# Altium PCB PCB_MAX7219_SHIELD.PcbDoc
Units mil, origin at the board's own origin, x right, y up, seen from the top; angles counter-clockwise.
Board outline 2755.91 x 2244.09 mil, 2 copper layers (Top Layer, Bottom Layer); 8 components, 25 nets, 164 pads, 11 vias.
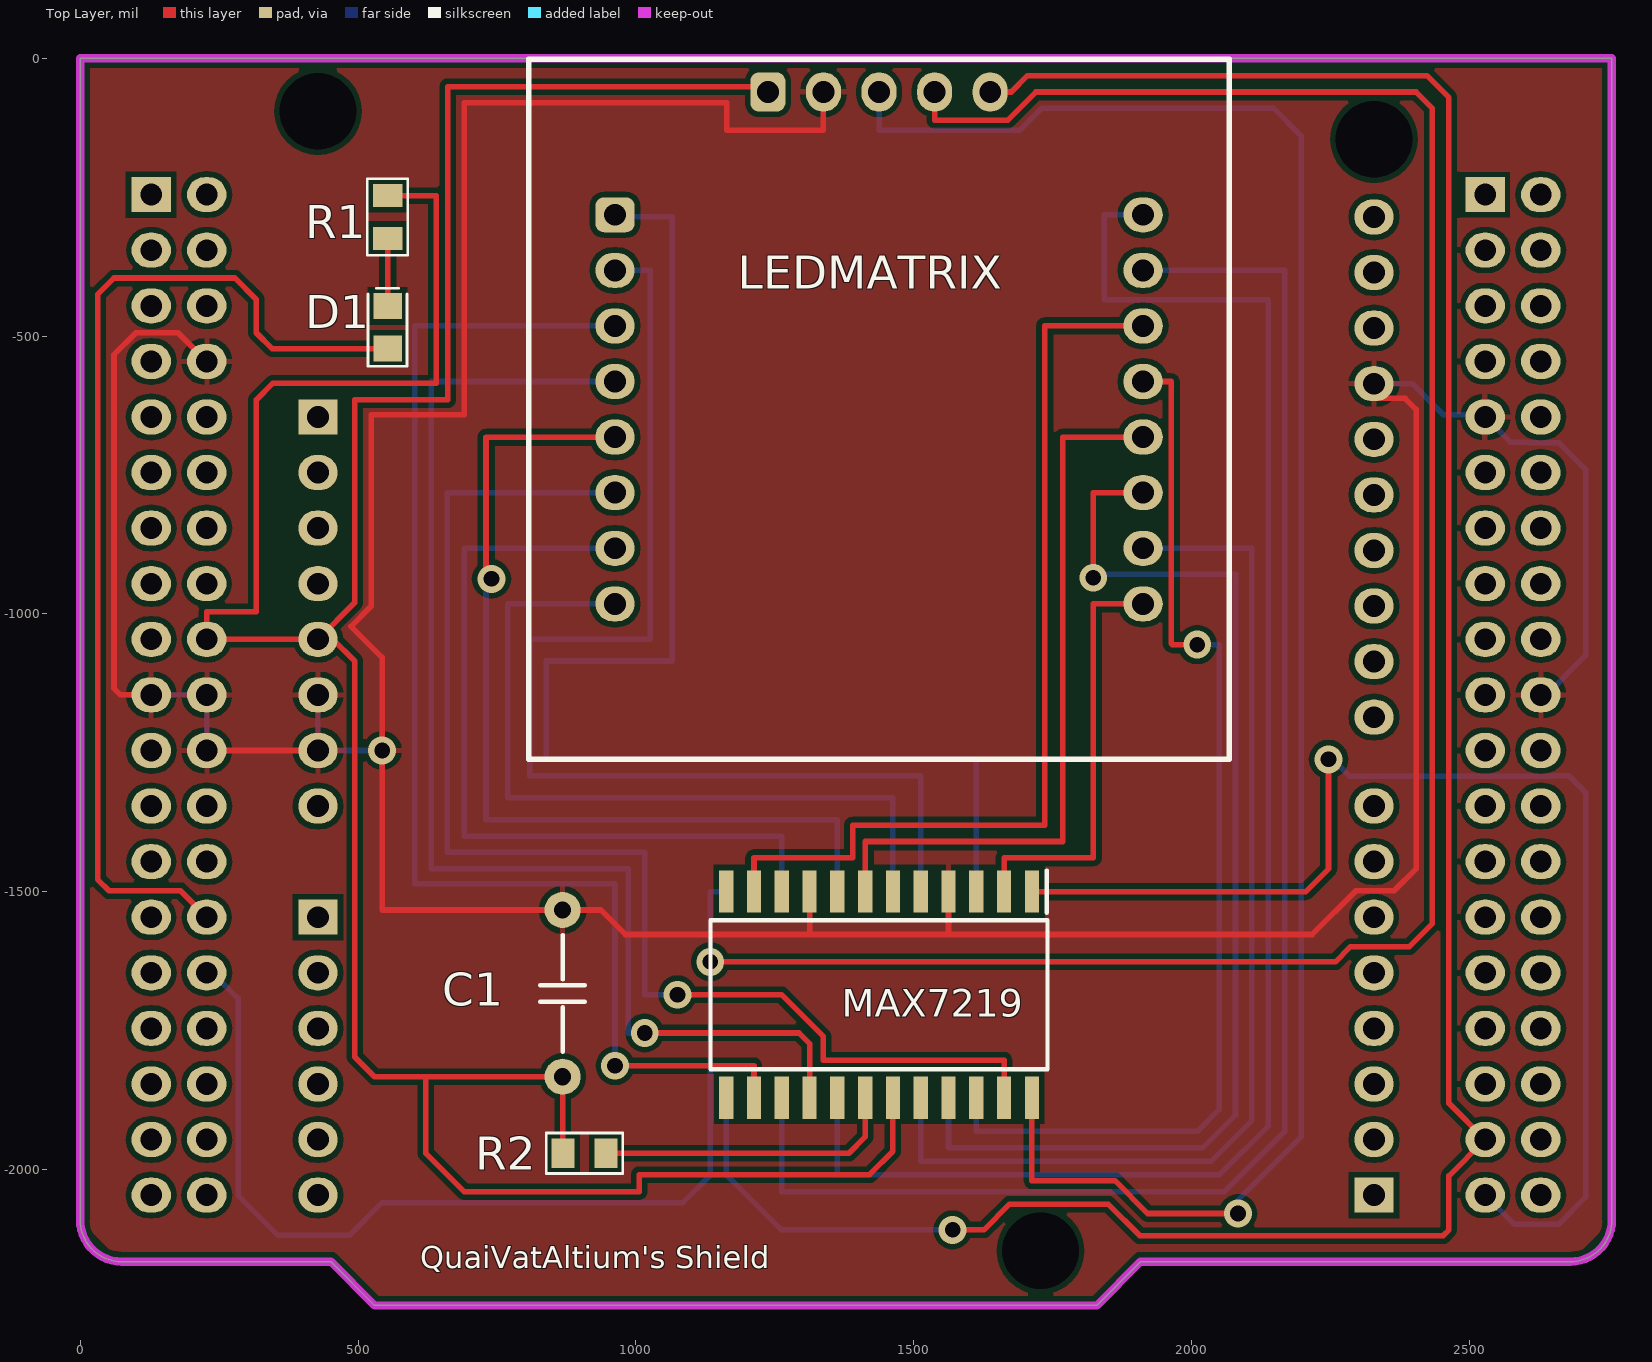
[diagram p0: Top Layer view]
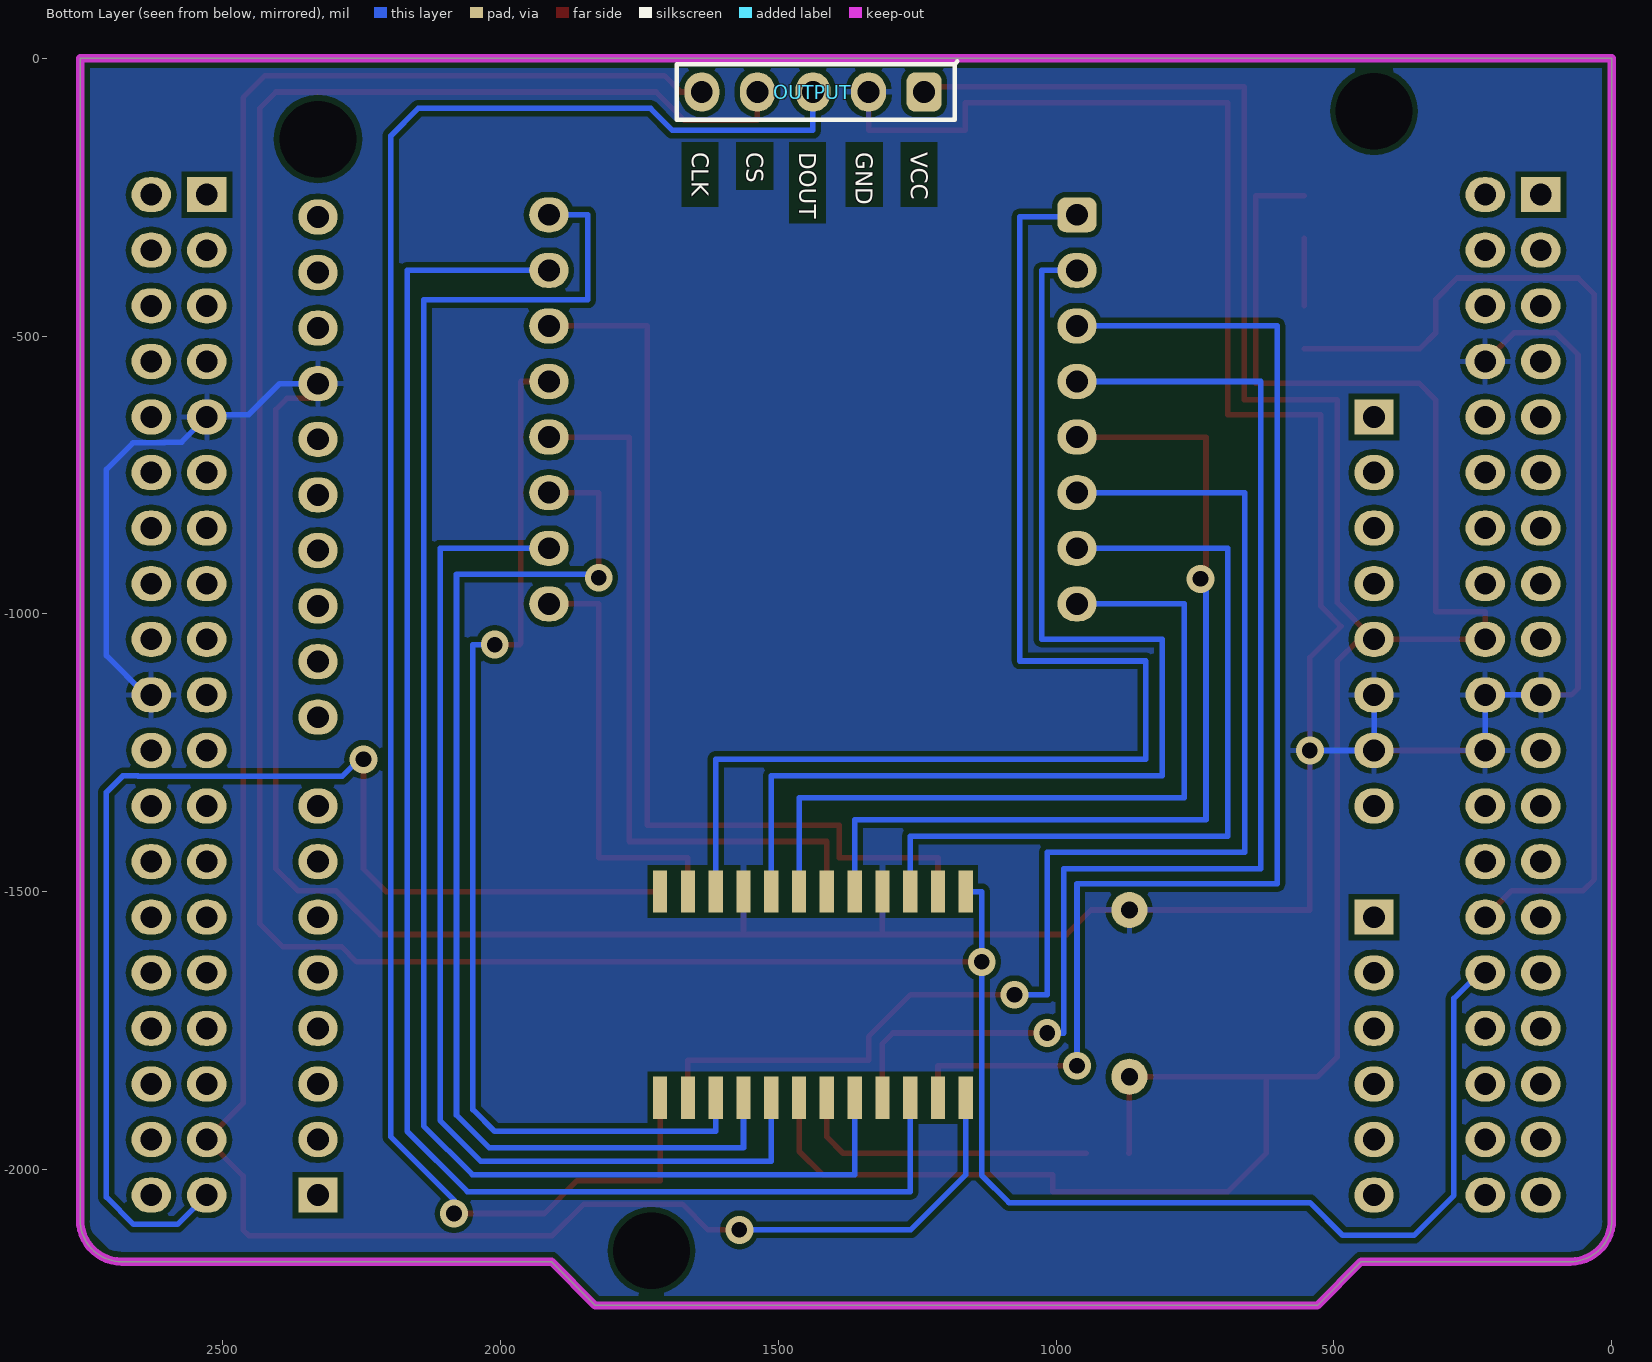
[diagram p1: Bottom Layer view, seen from below]
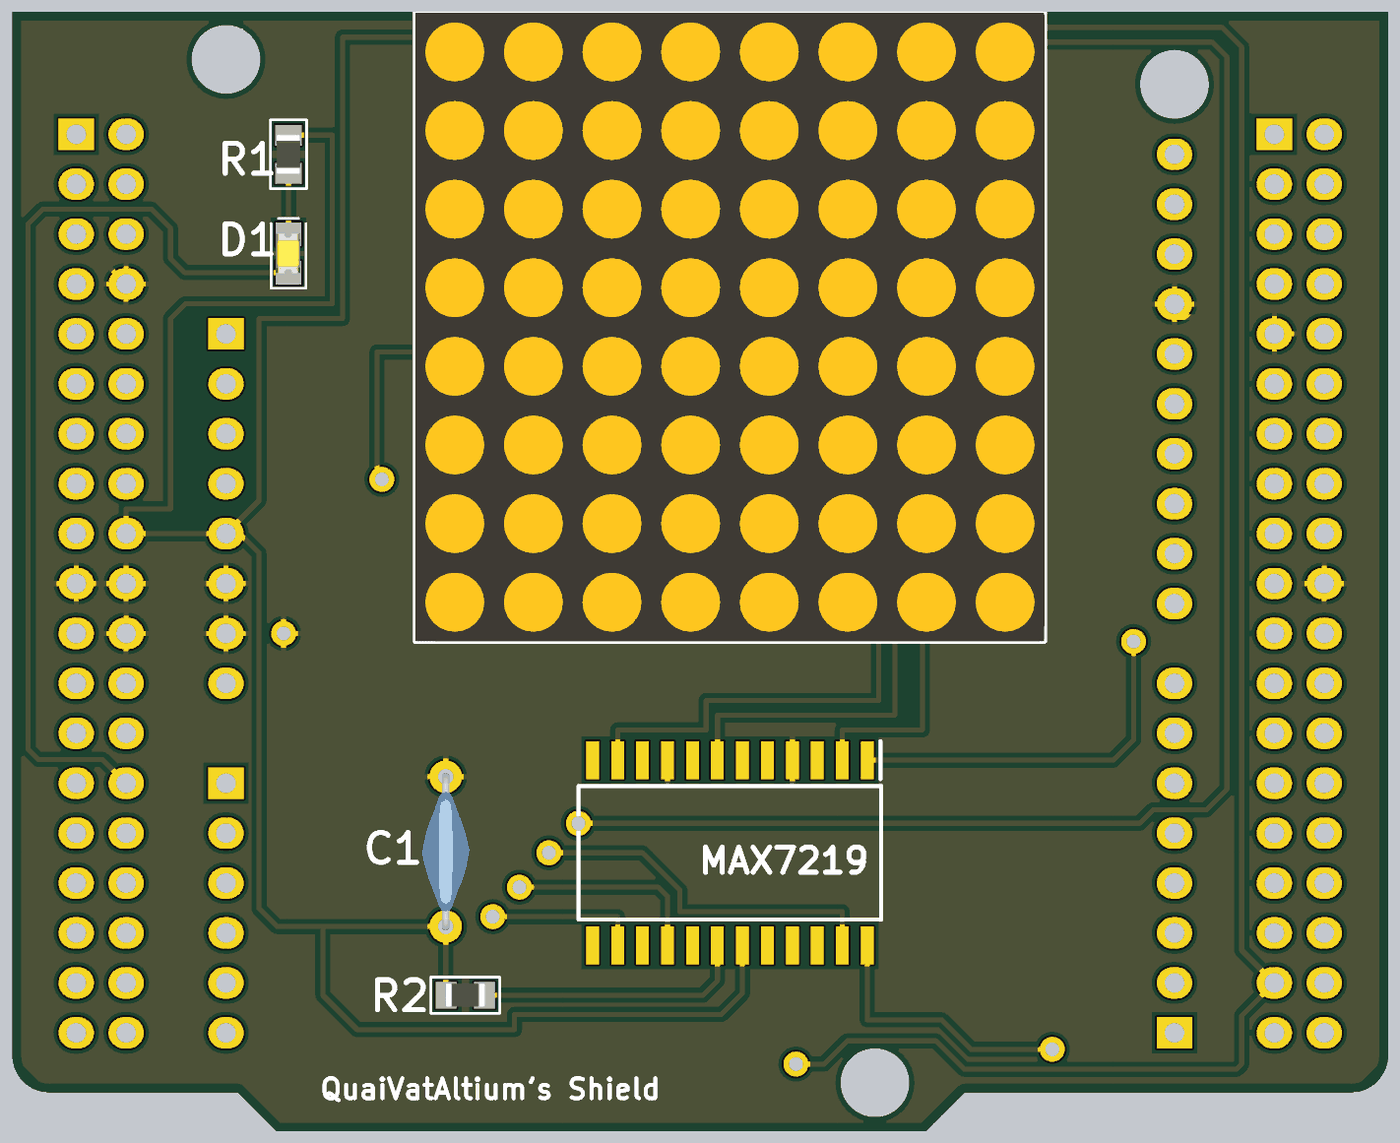
[diagram p2: 3D render of the assembled board from above, using the file's embedded part models]

## Layer stack, top to bottom
Top Solder: solder mask 0.4, Solder Resist, Dk 3.5
Top Layer: signal copper 1.4
Dielectric 1: dielectric 12.6, FR-4, Dk 4.8
Bottom Layer: signal copper 1.4
Bottom Solder: solder mask 0.4, Solder Resist, Dk 3.5

## Board outline
0,-2090.35 ccw(c75,-2090.35) 75,-2165.35 451.18,-2165.35 529.92,-2244.09 1829.13,-2244.09 1907.87,-2165.35 2680.91,-2165.35 ccw(c2680.91,-2090.35) 2755.91,-2090.35 2755.91,0 0,0

## Design rules (kind name [scope] priority, off if disabled: settings)
Clearance [All] p1: gap=10 ignorepadtopadclearanceinfootprint=FALSE except(0: Arc-Hole Track-Hole SMDPad-Hole THPad-Hole Via-Hole Fill-Hole Poly-Hole Region-Hole Text-Hole)
ComponentClearance [InComponent('U1')] p1: gap=0 collisioncheckmode=3 verticalgap=0 showdistances=FALSE
PolygonConnect [All] p1: connectstyle=Relief reliefconductorwidth=10 reliefentries=4 polygonreliefangle="90 Angle" airgapwidth=10
RoutingVias [All] p1: holewidth=28 width=50 viastyle="Through Hole" minholewidth=28 minwidth=50 maxholewidth=28 maxwidth=50
SolderMaskExpansion [All] p1: expansion=4
Width [All] p1: maxlimit=10 minlimit=10 preferedwidth=10
29 further rules are at their usual default settings.

## Classes and differential pairs
component class SCH_MAX7219_SHIELD: C1 LEDMATRIX OUTPUT "QuaiVatAltium's Shield" R1 R2 TESTLED

## Components (designator, comment, footprint, x,y, rotation, side; value= is the part's Value field where it differs from the comment)
C1 "100nf" "CAP Ceramic/W300" 868.11,-1532.68 r270 top
D1 "Led" "Led 0805" 553.15,-484.25 r270 top
LEDMATRIX "1088AS" LED/MATRIX/1088 1437.4,-631.89 r270 top locked (schematic designator D2)
MAX7219 "MAX7219CWG+" SOIC127P1032X265-24N 1437.4,-1685.04 r270 top locked (schematic designator B1)
OUTPUT "Header 5" HDR/Header/5 1437.4,-61.02 r0 bottom locked (schematic designator P1)
"QuaiVatAltium's Shield" "NUCLEO-F103RB" NUCLEO 0,-2165.35 r0 top locked (schematic designator U1)
R1 "9.53k" "R 0805" 553.15,-285.83 r270 top
R2 "9.53k" "R 0805" 907.48,-1970.47 r180 top

## Footprints (in the part's own frame and the unit in brackets; to place one, negate y for a bottom-side part, rotate by r counter-clockwise, add the part's x,y. Pads: shape width x height; smd on the part's side, far side on the other; paste and mask are expansions set on the pad)
"CAP Ceramic/W300" [mil]
  round 65 hole 31: 1(0,0) 2(300,0)
  silkscreen extent 45,-40 255,40, body extent -8,-47 307,47, height 340
HDR/Header/5 [mm]
  rrect50% 1.6x1.8 hole 1: 1(-5.08,0)
  oval 1.6x1.8 hole 1: 2(-2.54,0) 3(0,0) 4(2.54,0) 5(5.08,0)
  silkscreen extent -6.6,-1.4 6.22,1.27, body extent -6.35,-1.27 6.35,1.27, height 8.89
"Led 0805" [mm] "Led SMD 0805"
  rect 1.2x1.3 smd: 1(-0.975,0) 2(0.975,0)
  silkscreen extent -1.78,-0.89 1.78,0.89, body extent -1.01,-0.64 1.01,0.61, height 1.1
LED/MATRIX/1088 [mm]
  rrect50% 1.6x1.8 hole 1: 1(-8.89,-12.065)
  oval 1.6x1.8 hole 1: 2(-6.35,-12.065) 3(-3.81,-12.065) 4(-1.27,-12.065) 5(1.27,-12.065) 6(3.81,-12.065) 7(6.35,-12.065) 8(8.89,-12.065) 9(8.89,12.065) 10(6.35,12.065) 11(3.81,12.065) 12(1.27,12.065) 13(-1.27,12.065) 14(-3.81,12.065) 15(-6.35,12.065) 16(-8.89,12.065)
  silkscreen extent -16,-16 16,16, body extent -16,-16 16,16, height 8
NUCLEO [mm]
  oval 1.8x1.6 hole 1: A5_1(59.13,24.88) A5_2(59.13,27.42) A5_3(59.13,29.96) A5_4(59.13,32.5) A5_5(59.13,35.04) A5_6(59.13,37.58) A5_7(59.13,40.12) A5_8(59.13,42.66) A5_9(59.13,45.2) A5_10(59.13,47.74) A6_2(10.87,36.06) A6_3(10.87,33.52) A6_4(10.87,30.98) A6_5(10.87,28.44) A6_6(10.87,25.9) A6_7(10.87,23.36) A6_8(10.87,20.82) A8_2(10.87,13.2) A8_3(10.87,10.66) A8_4(10.87,8.12) A8_5(10.87,5.58) A8_6(10.87,3.04) A9_2(59.13,5.58) A9_3(59.13,8.12) A9_4(59.13,10.66) A9_5(59.13,13.2) A9_6(59.13,15.74) A9_7(59.13,18.28) A9_8(59.13,20.82) M7_2(5.79,48.76) M7_3(3.25,46.22) M7_4(5.79,46.22) M7_5(3.25,43.68) M7_6(5.79,43.68) M7_7(3.25,41.14) M7_8(5.79,41.14) M7_9(3.25,38.6) M7_10(5.79,38.6) M7_11(3.25,36.06) M7_12(5.79,36.06) M7_13(3.25,33.52) M7_14(5.79,33.52) M7_15(3.25,30.98) M7_16(5.79,30.98) M7_17(3.25,28.44) M7_18(5.79,28.44) M7_19(3.25,25.9) M7_20(5.79,25.9) M7_21(3.25,23.36) M7_22(5.79,23.36) M7_23(3.25,20.82) M7_24(5.79,20.82) M7_25(3.25,18.28) M7_26(5.79,18.28) M7_27(3.25,15.74) M7_28(5.79,15.74) M7_29(3.25,13.2) M7_30(5.79,13.2) M7_31(3.25,10.66) M7_32(5.79,10.66) M7_33(3.25,8.12) M7_34(5.79,8.12) M7_35(3.25,5.58) M7_36(5.79,5.58) M7_37(3.25,3.04) M7_38(5.79,3.04) M10_2(66.75,48.76) M10_3(64.21,46.22) M10_4(66.75,46.22) M10_5(64.21,43.68) M10_6(66.75,43.68) M10_7(64.21,41.14) M10_8(66.75,41.14) M10_9(64.21,38.6) M10_10(66.75,38.6) M10_11(64.21,36.06) M10_12(66.75,36.06) M10_13(64.21,33.52) M10_14(66.75,33.52) M10_15(64.21,30.98) M10_16(66.75,30.98) M10_17(64.21,28.44) M10_18(66.75,28.44) M10_19(64.21,25.9) M10_20(66.75,25.9) M10_21(64.21,23.36) M10_22(66.75,23.36) M10_23(64.21,20.82) M10_24(66.75,20.82) M10_25(64.21,18.28) M10_26(66.75,18.28) M10_27(64.21,15.74) M10_28(66.75,15.74) M10_29(64.21,13.2) M10_30(66.75,13.2) M10_31(64.21,10.66) M10_32(66.75,10.66) M10_33(64.21,8.12) M10_34(66.75,8.12) M10_35(64.21,5.58) M10_36(66.75,5.58) M10_37(64.21,3.04) M10_38(66.75,3.04)
  rect 1.8x1.6 hole 1: A6_1(10.87,38.6) A8_1(10.87,15.74) A9_1(59.13,3.04) M7_1(3.25,48.76) M10_1(64.21,48.76)
  round 0 hole 3.5 unplated: HOLD(10.87,52.57) HOLD(43.89,0.5) HOLD(59.13,51.3)
  Keep-Out Layer lines w0.381: 0,1.905 ccw(c1.905,1.905) 1.905,0 11.46,0 13.46,-2 46.46,-2 48.46,0 68.095,0 ccw(c68.095,1.905) 70,1.905 70,55 0,55 0,1.905
"R 0805" [mm] "Chip Resistor, 2-Leads, Body 2.0x1.3mm, IPC Medium Density"
  rect 1.05x1.35 smd: 1(-0.975,0) 2(0.975,0)
  silkscreen extent -1.75,-0.92 1.75,0.92, body extent -1,-0.61 1,0.59, height 0.5
SOIC127P1032X265-24N [mm]
  rect 1.925x0.65 all layers, no hole: 1(-4.712,6.985) 2(-4.712,5.715) 3(-4.712,4.445) 4(-4.712,3.175) 5(-4.712,1.905) 6(-4.712,0.635) 7(-4.712,-0.635) 8(-4.712,-1.905) 9(-4.712,-3.175) 10(-4.712,-4.445) 11(-4.712,-5.715) 12(-4.712,-6.985) 13(4.712,-6.985) 14(4.712,-5.715) 15(4.712,-4.445) 16(4.712,-3.175) 17(4.712,-1.905) 18(4.712,-0.635) 19(4.712,0.635) 20(4.712,1.905) 21(4.712,3.175) 22(4.712,4.445) 23(4.712,5.715) 24(4.712,6.985)
  silkscreen extent -5.68,-7.7 3.4,7.7

## Part data
C1: library part "Capacitor NP", "Capacitor non-pol"
D1: "Typical LED"
LEDMATRIX: library part "LED MATRIX 1088AS", "1088AS, Common-Cathode, LED Matrix 8x8, RED, 32x32mm"
MAX7219: "MAX7219CWG+, LED Driver, 8-Digits 64-Segments, 5V, 24-Pin SOIC W", Manufacturer_Name="Maxim Integrated", Mouser Part Number=700-MAX7219CWG, Arrow Part Number=MAX7219CWG+, Arrow Price/Stock=https://www.arrow.com/en/products/max7219cwg/maxim-integrated?region=nac, Datasheet Link=http://datasheets.maximintegrated.com/en/ds/MAX7219-MAX7221.pdf, Geometry.Height=2.65mm, Manufacturer_Part_Number=MAX7219CWG+, Mouser Price/Stock=https://www.mouser.co.uk/ProductDetail/Maxim-Integrated/MAX7219CWG%2b?qs=1THa7WoU59FAb2MozDF%2Fgw%3D%3D
OUTPUT: "Header, 5-Pin"
"QuaiVatAltium's Shield": "STM32F103RB, mbed-Enabled Development Nucleo-64 STM32F1 ARM® Cortex®-M3 MCU 32-Bit Embedded Evaluation Board", Manufacturer=STMicroelectronics, BRAND=STMicroelectronics, Manufacturer Product Number=NUCLEO-F103RB, PART NO=NUCLEO-F103RB, STOCK CODE=497-14362-ND, SUPPLIER=digi-key, TYPE="EVAL BRD"
R1 R2: library part Resistor, "Resistor"

## Via types
v1: diameter 50, hole 28, Top Layer to Bottom Layer, 11 vias

## Nets (pads, with @x,y where several pads share a name; then routed paths per layer and width w, separated by ;. In a path a pad name is that pad's centre, name@x,y a point inside that pad or via, vN(x,y) a via of type N, cw(c..) or ccw(c..) an arc to the next point about the centre after c; other vN are vias at no path point)
+5V: "QuaiVatAltium's Shield.A6_5" "QuaiVatAltium's Shield.M7_18" C1.2 MAX7219.19 OUTPUT.1 R1.1 R2.2 | length 5719.7
  Top Layer w10: R1.1 641.14,-247.44 641.14,-585.24 346.46,-585.24 316.93,-614.76 316.93,-996.06 227.95,-996.06 227.95,-1045.67 427.95,-1045.67 ; R2.2 868.11,-1969.49 C1.2 622.05,-1832.68 ; OUTPUT.1@1237.4,-51.18 661.42,-51.18 661.42,-614.76 494.09,-614.76 494.09,-979.53 427.95,-1045.67 ; MAX7219.19 1462.4,-1966.73 1420.28,-2008.86 1005.91,-2008.86 1005.91,-2039.37 690.94,-2039.37 622.05,-1970.47 622.05,-1832.68 ; 427.95,-1045.67 455.12,-1045.67 494.09,-1084.65 494.09,-1796.85 529.92,-1832.68 622.05,-1832.68
COL0: LEDMATRIX.13 MAX7219.22 | length 1959
  Top Layer w10: LEDMATRIX.13 1962.83,-581.89 1962.83,-1052.91 1965.04,-1055.12 v1(2009.84,-1055.12)
  Bottom Layer w10: MAX7219.22 1612.4,-1931.1 2009.84,-1931.1 2049.21,-1891.73 2049.21,-1055.12 v1(2009.84,-1055.12)
COL1: LEDMATRIX.3 MAX7219.14 | length 2361.1
  Top Layer w10: v1(962.4,-1812.99) 1212.4,-1812.99 MAX7219.14
  Bottom Layer w10: v1(962.4,-1812.99) 962.4,-1485.18 602.36,-1485.18 602.36,-481.89 LEDMATRIX.3 LEDMATRIX.3@962.4,-484.25
COL2: LEDMATRIX.4 MAX7219.16 | length 2288.5
  Top Layer w10: v1(1015.75,-1753.94) 1293.35,-1753.94 1312.4,-1772.99 MAX7219.16
  Bottom Layer w10: LEDMATRIX.4 631.89,-581.89 631.89,-1458.66 986.22,-1458.66 986.22,-1753.94 v1(1015.75,-1753.94)
COL3: LEDMATRIX.10 MAX7219.20 | length 1966
  Bottom Layer w10: MAX7219.20 1512.4,-1984.84 2034.84,-1984.84 2108.27,-1911.42 2108.27,-881.89 LEDMATRIX.10
COL4: LEDMATRIX.6 MAX7219.23 | length 2347.6
  Top Layer w10: v1(1074.8,-1685.04) 1261.81,-1685.04 1337.4,-1760.63 1337.4,-1803.15 1662.4,-1803.15 MAX7219.23
  Bottom Layer w10: LEDMATRIX.6 660.79,-781.89 660.79,-1429.13 1015.75,-1429.13 1015.75,-1685.04 v1(1074.8,-1685.04)
COL5: LEDMATRIX.11 MAX7219.21 | length 2105.2
  Top Layer w10: v1(1822.83,-934.84) 1822.83,-781.89 LEDMATRIX.11
  Bottom Layer w10: MAX7219.21 1562.4,-1960.63 2019.69,-1960.63 2078.74,-1901.57 2078.74,-928.39 1843.74,-928.39 1837.29,-934.84 v1(1822.83,-934.84)
COL6: LEDMATRIX.15 MAX7219.15 | length 2922.7
  Bottom Layer w10: MAX7219.15 1262.4,-2039.37 2059.06,-2039.37 2167.32,-1931.1 2167.32,-381.89 LEDMATRIX.15
COL7: LEDMATRIX.16 MAX7219.17 | length 2954.5
  Bottom Layer w10: MAX7219.17 1362.4,-2008.86 2050.2,-2008.86 2137.8,-1921.26 2137.8,-435.04 1842.52,-435.04 1842.52,-281.89 LEDMATRIX.16
DOUT: MAX7219.24 OUTPUT.3 | length 3405.3
  Top Layer w10: MAX7219.24 1712.4,-2019.68 1861.54,-2019.68 1920.59,-2078.74 v1(2083.17,-2078.74)
  Bottom Layer w10: OUTPUT.3@1437.4,-51.18 1437.4,-129.92 1690.16,-129.92 1729.53,-90.55 2147.64,-90.55 2196.85,-139.76 2196.85,-1940.95 2083.17,-2054.63 v1(2083.17,-2078.74)
GND: "QuaiVatAltium's Shield.A5_7" "QuaiVatAltium's Shield.A6_6" "QuaiVatAltium's Shield.A6_7" "QuaiVatAltium's Shield.M7_8" "QuaiVatAltium's Shield.M7_19" "QuaiVatAltium's Shield.M7_20" "QuaiVatAltium's Shield.M7_22" "QuaiVatAltium's Shield.M10_9" "QuaiVatAltium's Shield.M10_20" C1.1 MAX7219.4 MAX7219.9 OUTPUT.2 | length 7852.4
  Top Layer w10: 127.95,-1145.67 72.83,-1145.67 61.02,-1133.86 61.02,-533.46 100.39,-494.09 176.38,-494.09 227.95,-545.67 ; 227.95,-1245.67 427.95,-1245.67 ; MAX7219.9 1312.4,-1575.39 1311.02,-1576.77 ; OUTPUT.2@1337.4,-51.18 1337.4,-129.92 1163.39,-129.92 1163.39,-80.71 690.94,-80.71 690.94,-641.73 523.62,-641.73 523.62,-986.22 487.4,-1022.44 543.31,-1078.35 v1(543.31,-1245.67) 543.31,-1532.68 C1.1 937.01,-1532.68 981.1,-1576.77 1311.02,-1576.77 ; MAX7219.4 1562.4,-1576.77 ; 2347.64,-585.83 2327.95,-585.83 2327.95,-612.2 2383.86,-612.2 2403.54,-631.89 2403.54,-1458.66 2364.17,-1498.03 2295.28,-1498.03 2216.54,-1576.77 1562.4,-1576.77 ; 1311.02,-1576.77 1562.4,-1576.77
  Bottom Layer w10: 127.95,-1145.67 227.95,-1145.67 227.95,-1245.67 ; 427.95,-1145.67 427.95,-1245.67 v1(543.31,-1245.67) ; 2327.95,-585.83 2396.85,-585.83 2452.76,-641.73 2524.02,-641.73 2527.95,-645.67 2573.23,-690.94 2603.54,-690.94 2604.76,-692.17 2660.67,-692.17 2708.66,-740.16 2708.66,-1074.8 2637.8,-1145.67 2627.95,-1145.67
MOSI1: "QuaiVatAltium's Shield.M10_37" MAX7219.1 | length 2198.1
  Top Layer w10: MAX7219.1 2205.2,-1499.53 2246.06,-1458.66 v1(2246.06,-1261.81)
  Bottom Layer w10: v1(2246.06,-1261.81) 2246.06,-1253.62 2284.61,-1292.17 2651.15,-1292.17 2651.98,-1291.34 2679.13,-1291.34 2708.66,-1320.87 2708.66,-2049.21 2659.45,-2098.43 2580.71,-2098.43 2527.95,-2045.67
NetB1_18: MAX7219.18 R2.1 | length 549.2
  Top Layer w10: R2.1 1382.87,-1970.47 1412.4,-1940.94 MAX7219.18
NetD1_1: D1.1 R1.2 | length 121.7
  Top Layer w10: D1.1 R1.2
ROW0: LEDMATRIX.9 MAX7219.2 | length 767.6
  Top Layer w10: MAX7219.2 1662.4,-1438.98 1822.83,-1438.98 1822.83,-981.89 LEDMATRIX.9
ROW1: LEDMATRIX.14 MAX7219.11 | length 1717.6
  Top Layer w10: MAX7219.11 1212.4,-1438.98 1389.76,-1438.98 1389.76,-1379.92 1735.2,-1379.92 1735.2,-481.89 LEDMATRIX.14
ROW2: LEDMATRIX.8 MAX7219.6 | length 1403.1
  Bottom Layer w10: LEDMATRIX.8 769.68,-981.89 769.68,-1330.71 1462.4,-1330.71 MAX7219.6
ROW3: LEDMATRIX.12 MAX7219.7 | length 1317.6
  Top Layer w10: MAX7219.7 1412.4,-1409.45 1767.77,-1409.45 1767.77,-681.89 LEDMATRIX.12
ROW4: LEDMATRIX.1 MAX7219.3 | length 2320.4
  Bottom Layer w10: LEDMATRIX.1 962.4,-285.83 1064.96,-285.83 1064.96,-1084.65 838.58,-1084.65 838.58,-1261.81 1612.4,-1261.81 MAX7219.3
ROW5: LEDMATRIX.7 MAX7219.10 | length 1460.6
  Bottom Layer w10: LEDMATRIX.7 690.94,-881.89 690.94,-1399.61 1262.4,-1399.61 MAX7219.10
ROW6: LEDMATRIX.2 MAX7219.5 | length 2100.7
  Bottom Layer w10: LEDMATRIX.2 1025.59,-381.89 1025.59,-1045.28 809.06,-1045.28 809.06,-1291.34 1512.4,-1291.34 MAX7219.5
ROW7: LEDMATRIX.5 MAX7219.8 | length 1690
  Top Layer w10: v1(740.16,-937.01) 730.32,-927.17 730.32,-681.89 LEDMATRIX.5
  Bottom Layer w10: v1(740.16,-937.01) 730.32,-946.85 730.32,-1370.08 1362.4,-1370.08 MAX7219.8
SCLK1: "QuaiVatAltium's Shield.M10_35" MAX7219.13 OUTPUT.5 | length 4476.2
  Top Layer w10: v1(1569.65,-2108.27) 1625.98,-2108.27 1672.48,-2061.77 1849.65,-2061.77 1906.61,-2118.74 2452.13,-2118.74 2462.6,-2108.27 2462.6,-2011.02 2527.95,-1945.67 2462.6,-1880.31 2462.6,-70.87 2423.23,-31.5 1704.72,-31.5 1675.2,-61.02 1647.24,-61.02 OUTPUT.5@1637.4,-51.18
  Bottom Layer w10: MAX7219.13 1162.4,-2008.86 1261.81,-2108.27 v1(1569.65,-2108.27)
SS1: "QuaiVatAltium's Shield.M7_30" MAX7219.12 OUTPUT.4 | length 5697.5
  Top Layer w10: v1(1133.86,-1625.98) 2258.26,-1625.98 2285.07,-1599.17 2390.98,-1599.17 2433.07,-1557.09 2433.07,-90.55 2403.54,-61.02 1719.69,-61.02 1669.25,-111.46 1537.4,-111.46 1537.4,-66.25 1552.47,-66.25 OUTPUT.4@1537.4,-51.18
  Bottom Layer w10: 227.95,-1645.67 238.19,-1645.67 284.26,-1691.74 284.26,-2046.07 356.3,-2118.11 484.25,-2118.11 543.31,-2059.06 1084.65,-2059.06 1133.86,-2009.84 v1(1133.86,-1625.98) 1133.86,-1499.53 MAX7219.12
TOGGLE_LED: "QuaiVatAltium's Shield.M7_28" D1.2 | length 1898.6
  Top Layer w10: 227.95,-1545.67 180.32,-1498.03 52.03,-1498.03 31.5,-1477.5 31.5,-425.2 61.02,-395.67 278.41,-395.67 316.93,-434.19 316.93,-494.09 345.47,-522.64 D1.2
pads on no net: "QuaiVatAltium's Shield.A5_1" "QuaiVatAltium's Shield.A5_2" "QuaiVatAltium's Shield.A5_3" "QuaiVatAltium's Shield.A5_4" "QuaiVatAltium's Shield.A5_5" "QuaiVatAltium's Shield.A5_6" "QuaiVatAltium's Shield.A5_8" "QuaiVatAltium's Shield.A5_9" "QuaiVatAltium's Shield.A5_10" "QuaiVatAltium's Shield.A6_1" "QuaiVatAltium's Shield.A6_2" "QuaiVatAltium's Shield.A6_3" "QuaiVatAltium's Shield.A6_4" "QuaiVatAltium's Shield.A6_8" "QuaiVatAltium's Shield.A8_1" "QuaiVatAltium's Shield.A8_2" "QuaiVatAltium's Shield.A8_3" "QuaiVatAltium's Shield.A8_4" "QuaiVatAltium's Shield.A8_5" "QuaiVatAltium's Shield.A8_6" "QuaiVatAltium's Shield.A9_1" "QuaiVatAltium's Shield.A9_2" "QuaiVatAltium's Shield.A9_3" "QuaiVatAltium's Shield.A9_4" "QuaiVatAltium's Shield.A9_5" "QuaiVatAltium's Shield.A9_6" "QuaiVatAltium's Shield.A9_7" "QuaiVatAltium's Shield.A9_8" "QuaiVatAltium's Shield.HOLD" "QuaiVatAltium's Shield.M7_1" "QuaiVatAltium's Shield.M7_2" "QuaiVatAltium's Shield.M7_3" "QuaiVatAltium's Shield.M7_4" "QuaiVatAltium's Shield.M7_5" "QuaiVatAltium's Shield.M7_6" "QuaiVatAltium's Shield.M7_7" "QuaiVatAltium's Shield.M7_9" "QuaiVatAltium's Shield.M7_10" "QuaiVatAltium's Shield.M7_11" "QuaiVatAltium's Shield.M7_12" "QuaiVatAltium's Shield.M7_13" "QuaiVatAltium's Shield.M7_14" "QuaiVatAltium's Shield.M7_15" "QuaiVatAltium's Shield.M7_16" "QuaiVatAltium's Shield.M7_17" "QuaiVatAltium's Shield.M7_21" "QuaiVatAltium's Shield.M7_23" "QuaiVatAltium's Shield.M7_24" "QuaiVatAltium's Shield.M7_25" "QuaiVatAltium's Shield.M7_26" "QuaiVatAltium's Shield.M7_27" "QuaiVatAltium's Shield.M7_29" "QuaiVatAltium's Shield.M7_31" "QuaiVatAltium's Shield.M7_32" "QuaiVatAltium's Shield.M7_33" "QuaiVatAltium's Shield.M7_34" "QuaiVatAltium's Shield.M7_35" "QuaiVatAltium's Shield.M7_36" "QuaiVatAltium's Shield.M7_37" "QuaiVatAltium's Shield.M7_38" "QuaiVatAltium's Shield.M10_1" "QuaiVatAltium's Shield.M10_2" "QuaiVatAltium's Shield.M10_3" "QuaiVatAltium's Shield.M10_4" "QuaiVatAltium's Shield.M10_5" "QuaiVatAltium's Shield.M10_6" "QuaiVatAltium's Shield.M10_7" "QuaiVatAltium's Shield.M10_8" "QuaiVatAltium's Shield.M10_10" "QuaiVatAltium's Shield.M10_11" "QuaiVatAltium's Shield.M10_12" "QuaiVatAltium's Shield.M10_13" "QuaiVatAltium's Shield.M10_14" "QuaiVatAltium's Shield.M10_15" "QuaiVatAltium's Shield.M10_16" "QuaiVatAltium's Shield.M10_17" "QuaiVatAltium's Shield.M10_18" "QuaiVatAltium's Shield.M10_19" "QuaiVatAltium's Shield.M10_21" "QuaiVatAltium's Shield.M10_22" "QuaiVatAltium's Shield.M10_23" "QuaiVatAltium's Shield.M10_24" "QuaiVatAltium's Shield.M10_25" "QuaiVatAltium's Shield.M10_26" "QuaiVatAltium's Shield.M10_27" "QuaiVatAltium's Shield.M10_28" "QuaiVatAltium's Shield.M10_29" "QuaiVatAltium's Shield.M10_30" "QuaiVatAltium's Shield.M10_31" "QuaiVatAltium's Shield.M10_32" "QuaiVatAltium's Shield.M10_33" "QuaiVatAltium's Shield.M10_34" "QuaiVatAltium's Shield.M10_36" "QuaiVatAltium's Shield.M10_38"

## Polygon pours and split planes (outlines as drawn)
GND on Top Layer "GND_L01_P010" (solid, remove dead copper, pour order 10): 0,-11.81 0,-2090.35 75,-2165.35 451.18,-2165.35 529.92,-2244.09 1829.13,-2244.09 1907.87,-2165.35 2680.91,-2165.35 2755.91,-2090.35 2755.91,0
GND on Top Layer "GND_L01_P012" (solid, remove dead copper, pour order 12): 2531.5,372.05
no net on Top Layer "top" (solid, pour order 2): 1153.54,-1389.76
GND on Bottom Layer "GND_L02_P006" (solid, remove dead copper, pour order 6): 2755.91,0 2755.91,-2090.35 2680.91,-2165.35 1907.87,-2165.35 1829.13,-2244.09 529.92,-2244.09 451.18,-2165.35 75,-2165.35 0,-2090.35 0,0
GND on Bottom Layer "Bot" (solid, remove dead copper, pour order 8): -244.09,-602.36
no net on Bottom Layer "top" (solid, pour order 4): 1562.4,-1870.55

## Other copper
Bottom Layer:
  region: 622.05,-1185.83

## Silkscreen, mask and mechanical layers (free items; w line width, h text height)
Bottom Overlay:
  text "VCC" at 1261.81,-169.29 h30 r90
  text "GND" at 1360.24,-169.29 h30 r90
  text "DOUT" at 1462.4,-169.29 h30 r90
  text "CS" at 1557.09,-169.29 h30 r90
  text "CLK" at 1655.51,-169.29 h30 r90